# EAGLE board RobotArm (EAGLE 9.1.1)
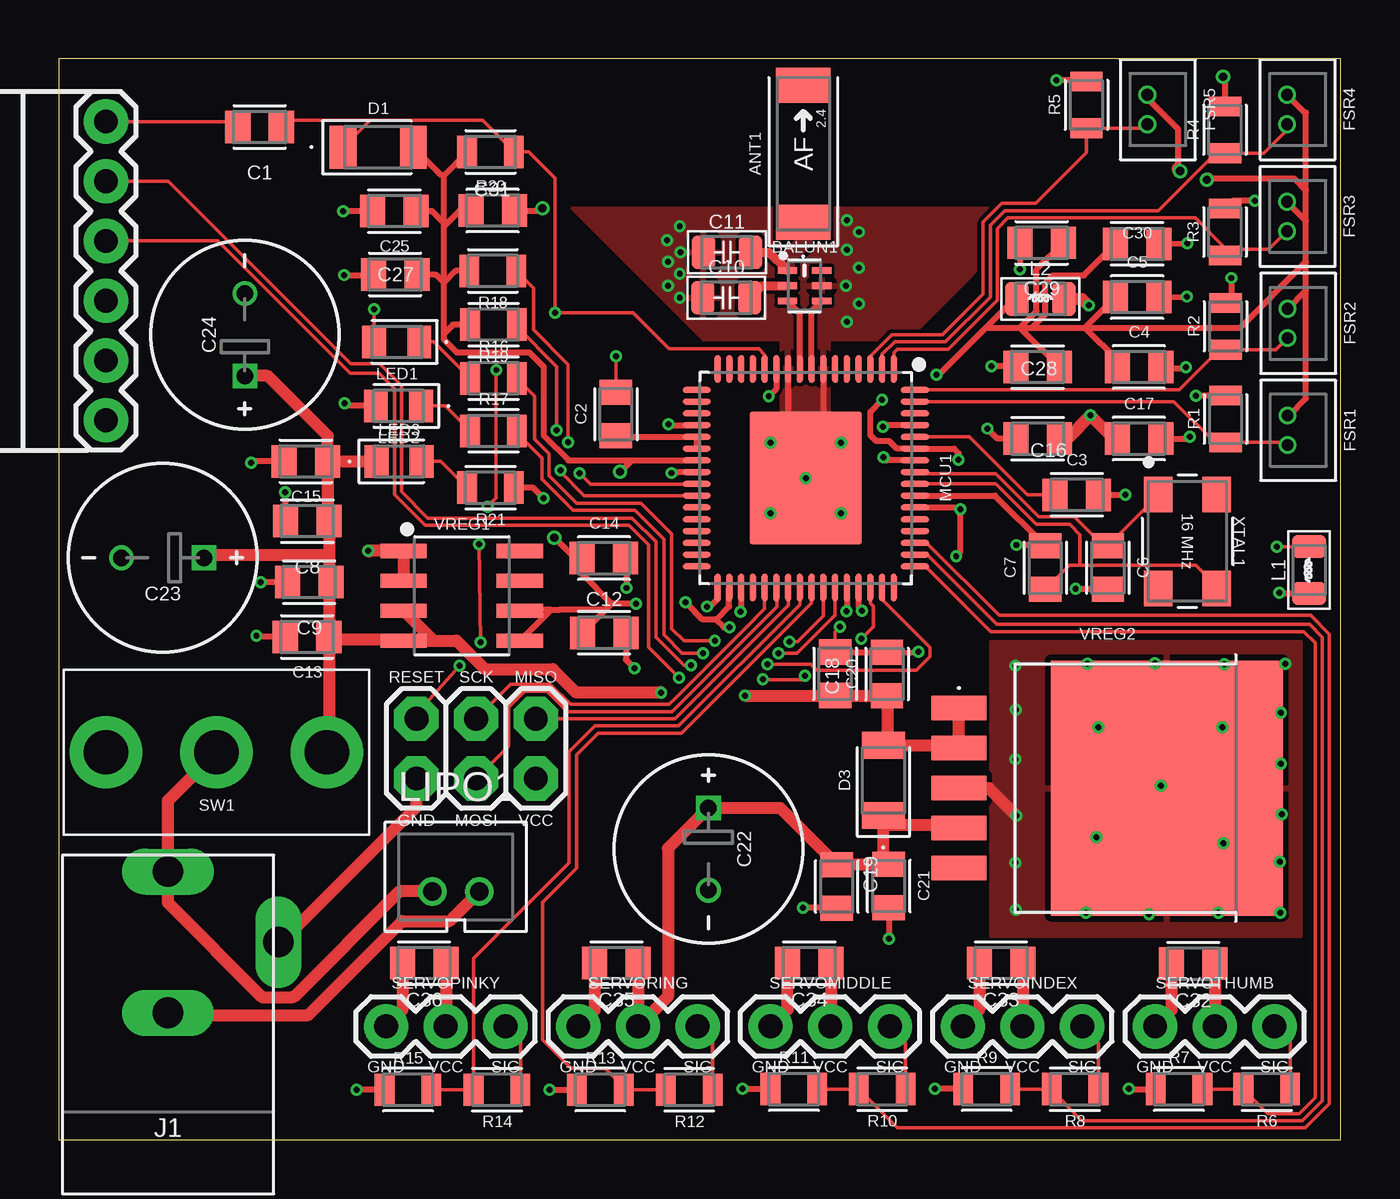
[diagram p0: board, top side]
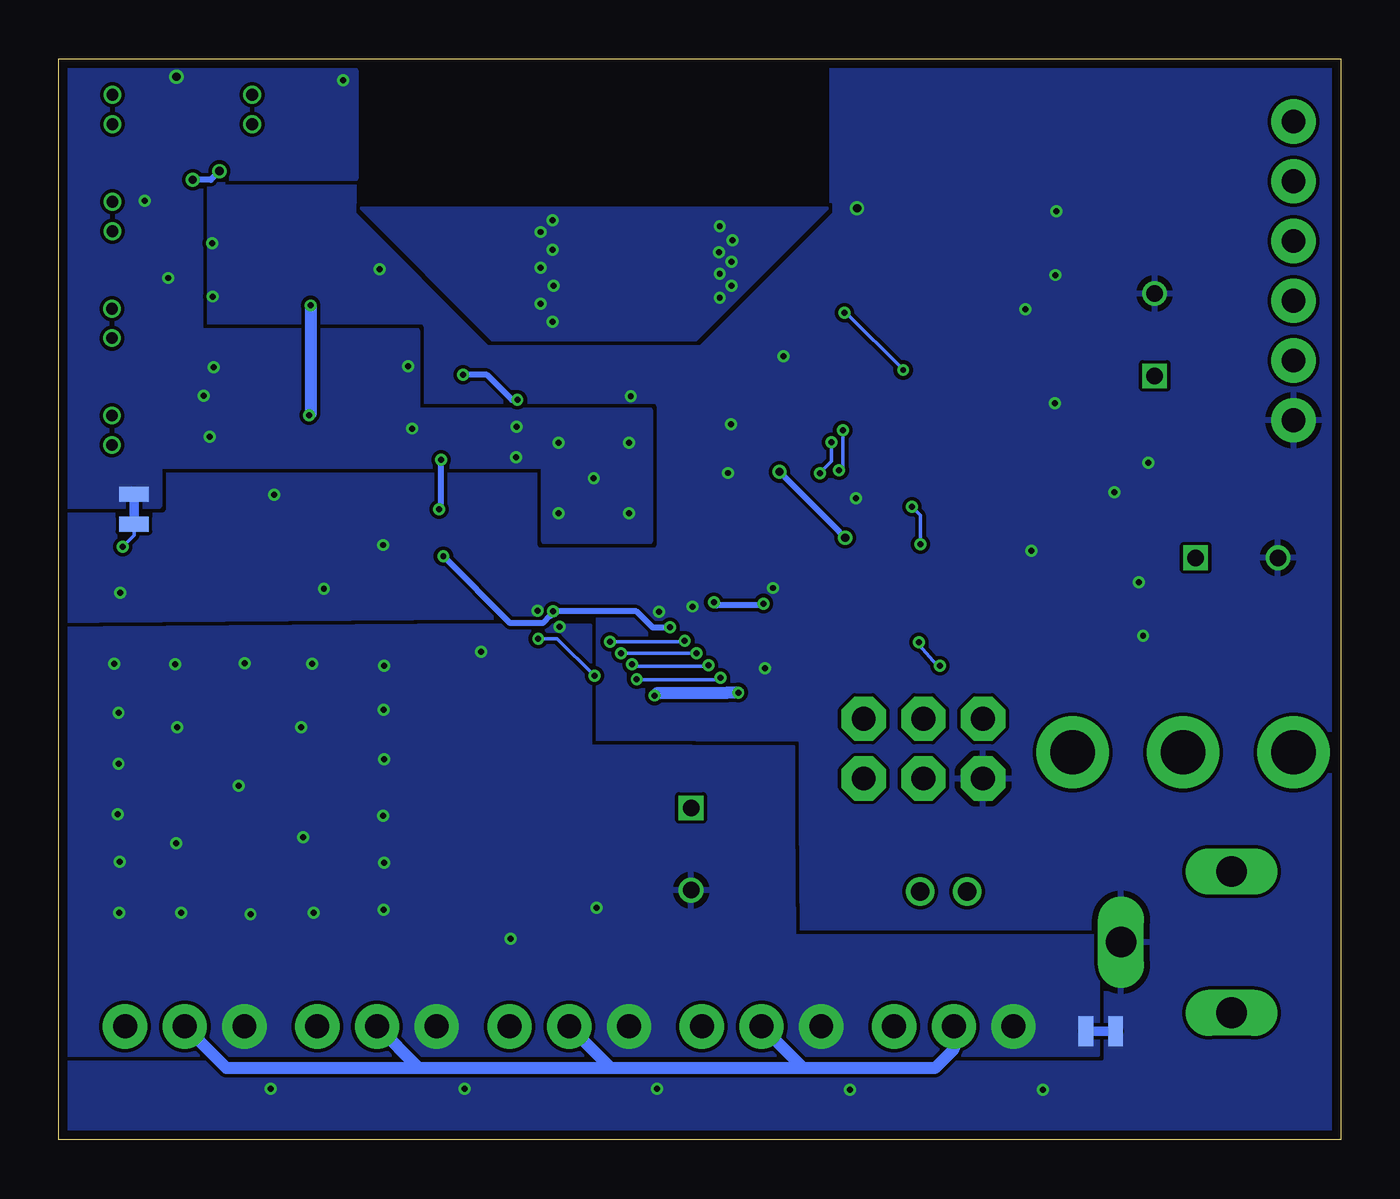
[diagram p1: board, bottom side, seen from below]

Size 54.53 x 45.97 mm. Coordinates in mm from the lower left corner, seen from the top.
Outline: 0,0 54.53,0 54.53,45.97 0,45.97 0,0
Copper layers (1*16): Top 0.035559375mm / dielectric 1.6mm / Bottom 0.035559375mm
Design rules "oshpark-2layer": minimum track width 6mil, minimum drill 10mil, track to track 6mil, track to pad 6mil, pad to pad 6mil, via to via 6mil, smd to smd 6mil, copper to edge 15mil, drill to drill 6mil, minimum pad ring 5mil, minimum via ring 5mil, stop-mask expansion 2.5mil, vias tented up to drill 0mil, thermal gap 10mil

## Footprints (pad centres in the part's own frame; a part is rotated, then mirrored left to right if it is on the bottom)
ANTC6522X100 = smd 1.478 x 2.312: 1 -2.917,0 | smd 1.482 x 2.312: 2 2.915,0
2X3-NS = drill 1.016 pad 1.88 octagon: GND 2.54,1.27; MISO -2.54,-1.27; MOSI 0,1.27; RESET 2.54,-1.27; SCK 0,-1.27; VCC -2.54,1.27
RESCAXE65P200X125X95-6 = smd 0.818 x 0.289: 1 -0.73,0.65; 2 -0.73,0; 3 -0.73,-0.65; 4 0.73,-0.65; 5 0.73,0; 6 0.73,0.65
CAPC2012X95_SMD-0805 = smd 1.065 x 1.379: 1 -0.925,0; 2 0.925,0
_CER_SMD-805 = smd 1 x 1.45: 1 -1,0; 2 1,0
_AE_PTH_DIA8-LS3.5-H21.50 = drill 0.7 square: + -1.75,0 | drill 0.7: - 1.75,0
SODFL3516X170 = smd 1.136 x 1.815: A -1.489,0; K 1.489,0
_MOLEX-0530470210_VERT_PITCH-1.25MM = drill 0.5: 1 -0.625,0; 2 0.625,0
FTDI_BASIC-6PIN-MALE-RA = drill 1.016 pad 1.88: CTS 0,3.76; DTR 0,-6.4; GND 0,6.3; RXI 0,-3.86; TXO 0,-1.32; VCC 0,1.22
POWER_JACK_PTH_ID2.1MM-OD5.5MM = drill 1.3 long: GND@1 0,-3; GND@2 4.7,0; PWR 0,3
_SMD-805 = smd 1 x 1.45: 1 -1,0; 2 1,0
LEDC2012X120_LED-0805 = smd 1.01 x 1.379: A -0.96,0; K 0.96,0
_MOLEX-89400_VERT_PITCH-2MM = drill 0.8: 1 -1,0; 2 1,0
QFN50P900X900X90-64 = smd 1.2 x 0.264: 1 -4.645,3.75; 2 -4.645,3.25; 3 -4.645,2.75; 4 -4.645,2.25; 5 -4.645,1.75; 6 -4.645,1.25; 7 -4.645,0.75; 8 -4.645,0.25; 9 -4.645,-0.25; 10 -4.645,-0.75; 11 -4.645,-1.25; 12 -4.645,-1.75; 13 -4.645,-2.25; 14 -4.645,-2.75; 15 -4.645,-3.25; 16 -4.645,-3.75; 33 4.645,-3.75; 34 4.645,-3.25; 35 4.645,-2.75; 36 4.645,-2.25; 37 4.645,-1.75; 38 4.645,-1.25; 39 4.645,-0.75; 40 4.645,-0.25; 41 4.645,0.25; 42 4.645,0.75; 43 4.645,1.25; 44 4.645,1.75; 45 4.645,2.25; 46 4.645,2.75; 47 4.645,3.25; 48 4.645,3.75 | smd 0.264 x 1.2: 17 -3.75,-4.645; 18 -3.25,-4.645; 19 -2.75,-4.645; 20 -2.25,-4.645; 21 -1.75,-4.645; 22 -1.25,-4.645; 23 -0.75,-4.645; 24 -0.25,-4.645; 25 0.25,-4.645; 26 0.75,-4.645; 27 1.25,-4.645; 28 1.75,-4.645; 29 2.25,-4.645; 30 2.75,-4.645; 31 3.25,-4.645; 32 3.75,-4.645; 49 3.75,4.645; 50 3.25,4.645; 51 2.75,4.645; 52 2.25,4.645; 53 1.75,4.645; 54 1.25,4.645; 55 0.75,4.645; 56 0.25,4.645; 57 -0.25,4.645; 58 -0.75,4.645; 59 -1.25,4.645; 60 -1.75,4.645; 61 -2.25,4.645; 62 -2.75,4.645; 63 -3.25,4.645; 64 -3.75,4.645 | smd 5.65 x 4.75: EP 0,0 | drill 0.254: P$1 -1.5,1.5; P$2 1.5,1.5; P$3 1.5,-1.5; P$4 -1.5,-1.5; P$5 0,0
2PT_GND_TIE = smd 0.635 x 1.27: P$1 -0.635,0; P$2 0.635,0
RESC2012X60_SMD-0805 = smd 0.838 x 1.379: 1 -0.995,0; 2 0.995,0
1X03-VERT-MALE = drill 1.016 pad 1.88: GND 2.54,0; SIG -2.54,0; VCC 0,0
SW_TOGGLE_SPDT_5A-28V_13L-7W = drill 1.875 pad 3.075: P 0,0; S1 0,-4.7; S2 0,4.7
SOIC127P600X265-8 = smd 1.968 x 0.599: 1 -2.473,1.905; 2 -2.473,0.635; 3 -2.473,-0.635; 4 -2.473,-1.905; 5 2.473,-1.905; 6 2.473,-0.635; 7 2.473,0.635; 8 2.473,1.905
TO170P1363X457-6 = smd 2.333 x 1.048: 1 -6.311,3.404; 2 -6.311,1.702; 3 -6.311,0; 4 -6.311,-1.702; 5 -6.311,-3.404 | smd 9.885 x 10.84: 6 2.535,0
OSCCC500X320X110 = smd 1.512 x 1.212: 1 -2,-1.25; 2 2,-1.25; 3 2,1.25; 4 -2,1.25

## Placement (x,y rotation side)
ANT1  2.45GHz  [ANTC6522X100]  31.67,41.94 90 top
AVR_ISP1  AVRISP  [2X3-NS]  17.75,16.64 180 top
BALUN1  50/100  [RESCAXE65P200X125X95-6]  31.72,36.32 0 top
C1  0.1uF/35V  [CAPC2012X95_SMD-0805]  8.54,43.08 180 top
C2  1uF/25V  [CAPC2012X95_SMD-0805]  23.7,30.86 90 top
C3  1uF/25V  [CAPC2012X95_SMD-0805]  43.31,27.43 0 top
C4  1uF/25V  [CAPC2012X95_SMD-0805]  45.95,32.87 0 top
C5  1uF/25V  [CAPC2012X95_SMD-0805]  45.87,35.84 0 top
C6  12pF/250V  [CAPC2012X95_SMD-0805]  44.63,24.33 270 top
C7  12pF/250V  [CAPC2012X95_SMD-0805]  41.96,24.33 90 top
C8  0.1uF/35V  [CAPC2012X95_SMD-0805]  10.58,26.31 180 top
C9  0.1uF/35V  [CAPC2012X95_SMD-0805]  10.65,23.72 180 top
C10  22PF/250V  [_CER_SMD-805]  28.4,35.81 0 top
C11  0.75PF/100V  [_CER_SMD-805]  28.42,37.74 0 top
C12  0.1uF/35V  [CAPC2012X95_SMD-0805]  23.2,21.56 0 top
C13  10uF/25V  [CAPC2012X95_SMD-0805]  10.57,21.39 180 top
C14  10uF/25V  [CAPC2012X95_SMD-0805]  23.19,24.74 0 top
C15  10uF/25V  [CAPC2012X95_SMD-0805]  10.52,28.85 180 top
C16  0.1uF/35V  [CAPC2012X95_SMD-0805]  41.64,29.82 180 top
C17  1uF/25V  [CAPC2012X95_SMD-0805]  45.95,29.82 0 top
C18  0.1uF/35V  [CAPC2012X95_SMD-0805]  33.02,19.82 90 top
C19  0.1uF/35V  [CAPC2012X95_SMD-0805]  33.1,10.78 270 top
C20  10uF/25V  [CAPC2012X95_SMD-0805]  35.23,19.81 90 top
C21  10uF/25V  [CAPC2012X95_SMD-0805]  35.31,10.79 270 top
C22  1000uF/16V  [_AE_PTH_DIA8-LS3.5-H21.50]  27.64,12.37 270 top
C23  1000uF/16V  [_AE_PTH_DIA8-LS3.5-H21.50]  4.42,24.75 180 top
C24  1000uF/16V  [_AE_PTH_DIA8-LS3.5-H21.50]  7.91,34.24 90 top
C25  1uF/25V  [CAPC2012X95_SMD-0805]  14.27,39.5 180 top
C27  0.1uF/35V  [CAPC2012X95_SMD-0805]  14.31,36.8 180 top
C28  0.1uF/35V  [CAPC2012X95_SMD-0805]  41.64,32.87 180 top
C29  0.1uF/35V  [CAPC2012X95_SMD-0805]  41.81,38.15 180 top
C30  1uF/25V  [CAPC2012X95_SMD-0805]  45.87,38.1 0 top
C31  0.1uF/35V  [CAPC2012X95_SMD-0805]  18.46,39.52 0 top
C32  10uF/25V  [CAPC2012X95_SMD-0805]  48.26,7.49 180 top
C33  10uF/25V  [CAPC2012X95_SMD-0805]  40.08,7.52 180 top
C34  10uF/25V  [CAPC2012X95_SMD-0805]  31.93,7.52 180 top
C35  10uF/25V  [CAPC2012X95_SMD-0805]  23.72,7.52 180 top
C36  10uF/25V  [CAPC2012X95_SMD-0805]  15.54,7.52 180 top
D1  1A/50V  [SODFL3516X170]  13.59,42.21 0 top
D3  1A/50V  [SODFL3516X170]  35.08,15.29 90 top
FSR1  10K  [_MOLEX-0530470210_VERT_PITCH-1.25MM]  52.27,30.18 270 top
FSR2  10K  [_MOLEX-0530470210_VERT_PITCH-1.25MM]  52.27,34.72 270 top
FSR3  10K  [_MOLEX-0530470210_VERT_PITCH-1.25MM]  52.25,39.27 270 top
FSR4  10K  [_MOLEX-0530470210_VERT_PITCH-1.25MM]  52.25,43.81 270 top
FSR5  10K  [_MOLEX-0530470210_VERT_PITCH-1.25MM]  46.3,43.81 270 top
FTDI1  FTDI  [FTDI_BASIC-6PIN-MALE-RA]  2.01,36.91 180 top
J1  5A/28V  [POWER_JACK_PTH_ID2.1MM-OD5.5MM]  4.65,8.41 0 top
L1  10uH  [_SMD-805]  53.19,24.23 90 top
L2  10uH  [_SMD-805]  41.76,35.76 0 top
LED1  GREEN  [LEDC2012X120_LED-0805]  14.38,33.93 180 top
LED2  GREEN  [LEDC2012X120_LED-0805]  14.45,31.22 180 top
LED3  BLUE  [LEDC2012X120_LED-0805]  14.48,28.85 0 top
LIPO1  Molex VERT 2mm pitch  [_MOLEX-89400_VERT_PITCH-2MM]  16.89,10.57 0 top
MCU1  ATMEGA128RFA1  [QFN50P900X900X90-64]  31.78,28.14 270 top
NET_BRIDGE1  2PT_GND_TIE  [2PT_GND_TIE]  10.21,4.62 0 bottom
NET_BRIDGE2  2PT_GND_TIE  [2PT_GND_TIE]  51.33,26.82 90 bottom
R1  2.2K  [RESC2012X60_SMD-0805]  49.63,30.66 90 top
R2  2.2K  [RESC2012X60_SMD-0805]  49.63,34.59 90 top
R3  2.2K  [RESC2012X60_SMD-0805]  49.61,38.61 90 top
R4  2.2K  [RESC2012X60_SMD-0805]  49.61,42.95 90 top
R5  2.2K  [RESC2012X60_SMD-0805]  43.71,44.02 90 top
R6  100  [RESC2012X60_SMD-0805]  51.38,2.16 180 top
R7  10K  [RESC2012X60_SMD-0805]  47.65,2.16 0 top
R8  100  [RESC2012X60_SMD-0805]  43.23,2.16 180 top
R9  10K  [RESC2012X60_SMD-0805]  39.47,2.16 0 top
R10  100  [RESC2012X60_SMD-0805]  35.03,2.16 180 top
R11  10K  [RESC2012X60_SMD-0805]  31.27,2.16 0 top
R12  100  [RESC2012X60_SMD-0805]  26.82,2.13 180 top
R13  10K  [RESC2012X60_SMD-0805]  23.04,2.13 0 top
R14  100  [RESC2012X60_SMD-0805]  18.64,2.13 180 top
R15  10K  [RESC2012X60_SMD-0805]  14.86,2.13 0 top
R16  1K  [RESC2012X60_SMD-0805]  18.49,32.38 0 top
R17  1K  [RESC2012X60_SMD-0805]  18.49,30.15 0 top
R18  10K  [RESC2012X60_SMD-0805]  18.47,36.96 180 top
R19  10K  [RESC2012X60_SMD-0805]  18.49,34.67 180 top
R20  10K  [RESC2012X60_SMD-0805]  18.36,42.01 180 top
R21  10K  [RESC2012X60_SMD-0805]  18.36,27.74 180 top
SERVOINDEX  MG90S  [1X03-VERT-MALE]  41,4.83 180 top
SERVOMIDDLE  MG90S  [1X03-VERT-MALE]  32.82,4.83 180 top
SERVOPINKY  MG90S  [1X03-VERT-MALE]  16.46,4.83 180 top
SERVORING  MG90S  [1X03-VERT-MALE]  24.64,4.83 180 top
SERVOTHUMB  MG90S  [1X03-VERT-MALE]  49.17,4.83 180 top
SW1  5A/28V  [SW_TOGGLE_SPDT_5A-28V_13L-7W]  6.71,16.48 90 top
VREG1  1A/3.3V  [SOIC127P600X265-8]  17.14,23.14 0 top
VREG2  5A/5V  [TO170P1363X457-6]  44.6,14.96 0 top
XTAL1  16 MHz  [OSCCC500X320X110]  48.01,25.45 270 top

## Library data of the parts
ANT1 = PiB_radio_frequency; DATASHEET: https://linxtechnologies.com/wp/wp-content/uploads/ant-fff-chp-x.pdf; DIST: Digikey; DISTLINK: https://www.digikey.com/products/en?keywords=ANT-2.45-CHPCT-ND; DISTPN: ANT-2.45-CHPCT-ND; MFR: Linx Technologies Inc.; MPN: ANT-2.45-CHP-T
AVR_ISP1 = PiB_connectors; DATASHEET: https://cdn.amphenol-icc.com/media/wysiwyg/files/drawing/67996.pdf; DIST: Digikey; DISTLINK: https://www.digikey.com/products/en?keywords=609-3234-ND; DISTPN: 609-3234-ND; MFR: Amphenol FCI; MPN: 67997-206HLF
BALUN1 = PiB_radio_frequency; DATASHEET: http://katalog.we-online.de/pbs/datasheet/748421245.pdf; DIST: Digikey; DISTLINK: https://www.digikey.com/products/en?keywords=732-2230-6-ND; DISTPN: 732-2230-6-ND; MFR: Wurth Electronics Inc.; MPN: 748421245
C1 C8 C9 C12 C16 C18 C19 C27-C29 C31 = PiB_capacitors; DATASHEET: http://ds.yuden.co.jp/TYCOMPAS/ut/detail.do?productNo=GMK212BJ104KGHT&fileName=GMK212BJ104KGHT_SS&mode=specSheetDownload; DIST: Digikey; DISTLINK: https://www.digikey.com/products/en?keywords=587-3364-1-ND; DISTPN: 587-3364-1-ND; MFR: Taiyo Yuden; MPN: GMK212BJ104KGHT
C2-C5 C17 C25 C30 = PiB_capacitors; DATASHEET: https://search.murata.co.jp/Ceramy/image/img/A01X/G101/ENG/GRM216R61E105KA12-01.pdf; DIST: Digikey; DISTLINK: https://www.digikey.com/products/en?keywords=490-1700-1-ND; DISTPN: 490-1700-1-ND; MFR: Murata Electronics North America; MPN: GRM216R61E105KA12D
C6 C7 = PiB_capacitors; DATASHEET: http://search.murata.co.jp/Ceramy/image/img/A01X/G101/ENG/GRM21A5C2E120JW01-01.pdf; DIST: Digikey; DISTLINK: https://www.digikey.com/products/en?keywords=490-5531-1-ND; DISTPN: 490-5531-1-ND; MFR: Murata Electronics North America; MPN: GRM21A5C2E120JW01D
C10 = PiB_capacitors; CREATOR: Kenmei; DATASHEET: http://search.murata.co.jp/Ceramy/image/img/A01X/G101/ENG/GRM21A5C2E220JW01-01.pdf; DIST: Digikey; DISTLINK: https://www.digikey.com/product-detail/en/murata-electronics-north-america/GRM21A5C2E220JW01D/490-5534-1-ND/2334930; DISTPN: 490-5534-1-ND; MFR: Murata Electronics North America; MPN: GRM21A5C2E220JW01D; TESTED: NO
C11 = PiB_capacitors; CREATOR: Kenmei; DATASHEET: http://search.murata.co.jp/Ceramy/image/img/A01X/G101/ENG/GQM2195C2AR75CB01-01.pdf; DIST: Digikey; DISTLINK: https://www.digikey.com/product-detail/en/murata-electronics-north-america/GQM2195C2AR75CB01D/490-3585-1-ND/789585; DISTPN: 490-3585-1-ND; MFR: Murata Electronics North America; MPN: GQM2195C2AR75CB01D; TESTED: NO
C13-C15 C20 C21 C32-C36 = PiB_capacitors; DATASHEET: https://www.yuden.co.jp/productdata/catalog/mlcc_all_e.pdf; DIST: Digikey; DISTLINK: https://www.digikey.com/products/en?keywords=587-2985-1-ND; DISTPN: 587-2985-1-ND; MFR: Taiyo Yuden; MPN: TMK212BBJ106KG-T
C22-C24 = PiB_capacitors; DATASHEET: http://www.chemi-con.co.jp/cgi-bin/CAT_DB/SEARCH/cat_db_al.cgi?e=e&j=p&pdfname=kzm; DIST: Digikey; DISTLINK: https://www.digikey.com/products/en?keywords=565-3567-ND; DISTPN: 565-3567-ND; MFR: United Chemi-Con; MPN: EKZM160ELL102MH20D
D1 D3 = PiB_discrete_semiconductors; DATASHEET: http://www.comchiptech.com/cms/UserFiles/CGRKM4001-HF%20Thru.%20CGRKM4007-HF%20RevG.pdf; DIST: Digikey; DISTLINK: https://www.digikey.com/products/en?keywords=641-1511-1-ND; DISTPN: 641-1511-1-ND; MFR: Comchip Technology; MPN: CGRKM4001-HF
FSR1-FSR5 = PiB_sensors; DATASHEET: https://cdn2.hubspot.net/hubfs/3899023/Interlinkelectronics%20November2017/Docs/Datasheet_FSR.pdf; DATASHEET_CONNECTOR1: https://www.molex.com/pdm_docs/sd/530470210_sd.pdf; DATASHEET_CONNECTOR2: https://www.molex.com/pdm_docs/sd/510210700_sd.pdf; DATASHEET_CRIMP: https://www.molex.com/pdm_docs/sd/500798000_sd.pdf; DIST: Digikey; DISTLINK: https://www.digikey.com/products/en?keywords=1027-1014-ND; DISTLINK_CONNECTOR1: https://www.digikey.com/products/en?keywords=WM1731-ND; DISTLINK_CONNECTOR2: https://www.digikey.com/products/en?keywords=WM1720-ND; DISTLINK_CRIMP: https://www.digikey.com/products/en?keywords=WM1142CT-ND; DISTPN: 1027-1014-ND; DISTPN_CONNECTOR1: WM1731-ND; DISTPN_CONNECTOR2: WM1720-ND; DISTPN_CRIMP: WM1142CT-ND; DIST_CONNECTOR1: Digikey; DIST_CONNECTOR2: Digikey; DIST_CRIMP: Digikey; MFR: Spectra Symbol; MFR_CONNECTOR1: Molex, LLC; MFR_CONNECTOR2: Molex, LLC; MFR_CRIMP: Molex, LLC; MPN: FS-L-0095-103-ST; MPN_CONNECTOR1: 0530470210; MPN_CONNECTOR2: 51021-0200; MPN_CRIMP: 0500798000
FTDI1 = PiB_connectors; DATASHEET: https://media.digikey.com/pdf/Data%20Sheets/Sparkfun%20PDFs/DEV-09873_Web.pdf; DATASHEET_CONNECTOR: https://cdn.amphenol-icc.com/media/wysiwyg/files/drawing/68015.pdf; DIST: Digikey; DISTLINK: https://www.digikey.com/products/en?keywords=1568-1104-ND; DISTLINK_CONNECTOR: https://www.digikey.com/products/en?keywords=609-3327-ND; DISTPN: 1568-1104-ND; DISTPN_CONNECTOR: 609-3327-ND; DIST_CONNECTOR: Digikey; MFR: SparkFun Electronics; MFR_CONNECTOR: Amphenol FCI; MPN: DEV-09873; MPN_CONNECTOR: 68016-406HLF
J1 = PiB_connectors; DATASHEET: https://www.cui.com/product/resource/pj-102a.pdf; DIST: Digikey; DISTLINK: https://www.digikey.com/products/en?keywords=CP-102A-ND; DISTPN: CP-102A-ND; MFR: CUI Inc.; MPN: PJ-102A
L1 L2 = PiB_inductors; CREATOR: MrSwirlyEyes; DATASHEET: http://ds.yuden.co.jp/TYCOMPAS/ut/detail.do?productNo=CB2012T100KR&fileName=CB2012T100KR_SS&mode=specSheetDownload; DIST: Digikey; DISTLINK: https://www.digikey.com/products/en?keywords=587-2452-1-ND; DISTPN: 587-2452-1-ND; MFR: Taiyo Yuden; MPN: CB2012T100KR
LED1 LED2 = PiB_leds; DATASHEET: http://optoelectronics.liteon.com/upload/download/DS22-2000-073/LTST-C170KGKT.pdf; DIST: Digikey; DISTLINK: https://www.digikey.com/products/en?keywords=160-1414-1-ND; DISTPN: 160-1414-1-ND; MFR: Lite-On Inc.; MPN: LTST-C170KGKT
LED3 = PiB_leds; DATASHEET: http://optoelectronics.liteon.com/upload/download/DS-22-99-0226/LTST-C170TBKT.pdf; DIST: Digikey; DISTLINK: https://www.digikey.com/products/en?keywords=160-1579-1-ND; DISTPN: 160-1579-1-ND; MFR: Lite-On Inc.; MPN: LTST-C170TBKT
LIPO1 = PiB_connectors; DATASHEET_CONNECTOR1: https://www.molex.com/pdm_docs/sd/894000220_sd.pdf; DATASHEET_CONNECTOR2: https://www.molex.com/pdm_docs/sd/873690200_sd.pdf; DATASHEET_CRIMP: https://www.molex.com/pdm_docs/sd/502128000_sd.pdf; DISTLINK_CONNECTOR1: https://www.digikey.com/products/en?keywords=WM4340-ND; DISTLINK_CONNECTOR2: https://www.digikey.com/products/en?keywords=WM10118-ND; DISTLINK_CRIMP: https://www.digikey.com/products/en?keywords=WM4561CT-ND; DISTPN_CONNECTOR1: WM4340-ND; DISTPN_CONNECTOR2: WM10118-ND; DISTPN_CRIMP: WM4561CT-ND; DIST_CONNECTOR1: Digikey; DIST_CONNECTOR2: Digikey; DIST_CRIMP: Digikey; MFR_CONNECTOR1: Molex, LLC; MFR_CONNECTOR2: Molex, LLC; MFR_CRIMP: Molex, LLC; MPN_CONNECTOR1: 0894000220; MPN_CONNECTOR2: 0873690200; MPN_CRIMP: 50212-8000
MCU1 = PiB_ic_microcontrollers; DATASHEET: http://www.microchip.com/mymicrochip/filehandler.aspx?ddocname=en590262; DIST: Digikey; DISTLINK: https://www.digikey.com/products/en?keywords=ATMEGA128RFA1-ZU-ND; DISTPN: ATMEGA128RFA1-ZU-ND; MFR: Microchip Technology; MPN: ATMEGA128RFA1-ZU
NET_BRIDGE1 NET_BRIDGE2 = PiB_power_symbols
R1-R5 = PiB_resistors; DATASHEET: http://www.yageo.com/NewPortal/yageodocoutput?fileName=/pdf/R-Chip/PYu-RC_51_RoHS_P_0.pdf; DIST: Digikey; DISTLINK: https://www.digikey.com/products/en?keywords=YAG1332CT-ND; DISTPN: YAG1332CT-ND; MFR: Yageo; MPN: RC0805JR-072K2P
R6 R8 R10 R12 R14 = PiB_resistors; DATASHEET: http://www.yageo.com/NewPortal/yageodocoutput?fileName=/pdf/R-Chip/PYu-AC_51_RoHS_L_6.pdf; DIST: Digikey; DISTLINK: https://www.digikey.com/products/en?keywords=YAG3757CT-ND; DISTPN: YAG3757CT-ND; MFR: Yageo; MPN: AC0805JR-07100RL
R7 R9 R11 R13 R15 R18-R21 = PiB_resistors; DATASHEET: http://www.yageo.com/documents/recent/PYu-RC_Group_51_RoHS_L_9.pdf; DIST: Digikey; DISTLINK: https://www.digikey.com/products/en?keywords=311-10KARCT-ND; DISTPN: 311-10KARCT-ND; MFR: Yageo; MPN: RC0805JR-0710KL
R16 R17 = PiB_resistors; DATASHEET: http://www.yageo.com/documents/recent/PYu-RC_Group_51_RoHS_L_9.pdf; DIST: Digikey; DISTLINK: https://www.digikey.com/products/en?keywords=311-1.0KARCT-ND; DISTPN: 311-1.0KARCT-ND; MFR: Yageo; MPN: RC0805JR-071KL
SERVOINDEX SERVOMIDDLE SERVOPINKY SERVORING SERVOTHUMB = PiB
SW1 = PiB_switches; DATASHEET: http://spec_sheets.e-switch.com/specs/T111597.pdf; DIST: Digikey; DISTLINK: https://www.digikey.com/products/en?keywords=EG2355-ND; DISTPN: EG2355-ND; MFR: E-Switch; MPN: 100SP1T1B4M2QE
VREG1 = PiB_ic_power; DATASHEET: http://www.ti.com/lit/ds/symlink/tps768.pdf; DIST: Digikey; DISTLINK: https://www.digikey.com/products/en?keywords=296-46395-1-ND; DISTPN: 296-46395-1-ND; MFR: Texas Instruments; MPN: TPS76833QDR
VREG2 = PiB_ic_power; DATASHEET: http://ww1.microchip.com/downloads/en/DeviceDoc/20005685A.pdf; DIST: Digikey; DISTLINK: https://www.digikey.com/products/en?keywords=576-2240-ND; DISTPN: 576-2240-ND; MFR: Microchip Technology; MPN: MIC29501-5.0WU
XTAL1 = PiB; DATASHEET: https://abracon.com/Resonators/abm3b.pdf; DIST: Digikey; DISTLINK: https://www.digikey.com/products/en?keywords=535-9122-1-ND; DISTPN: 535-9122-1-ND; MFR: Abracon LLC; MPN: ABM3B-16.000MHZ-B2-T

## Nets
5V: C19.1 C21.1 C22.+ C32.1 C33.1 C34.1 C35.1 C36.1 D3.A SERVOINDEX.VCC SERVOMIDDLE.VCC SERVOPINKY.VCC SERVORING.VCC SERVOTHUMB.VCC VREG2.4
+: J1.PWR LIPO1.1 SW1.P
-: J1.GND@1 LIPO1.2
A5: MCU1.4
A6: MCU1.5
A7: MCU1.6
AGND: BALUN1.5 C4.2 C10.1 C11.1 C16.2 C17.2 C28.2 MCU1.7 MCU1.10 MCU1.58 MCU1.61 MCU1.EP MCU1.P$1 MCU1.P$2 MCU1.P$3 MCU1.P$4 MCU1.P$5 NET_BRIDGE2.P$2 R1.2 R2.2 R3.2 R4.2 R5.2
AVCC: C16.1 C17.1 L2.2
GND: AVR_ISP1.GND C2.2 C3.2 C5.2 C6.2 C7.2 C8.2 C9.2 C12.2 C13.2 C14.2 C15.2 C23.- C24.- C25.2 C27.2 C29.2 C30.2 C31.2 FTDI1.GND J1.GND@2 L1.1 LED1.K LED2.K MCU1.11 MCU1.20 MCU1.24 MCU1.33 MCU1.35 MCU1.45 MCU1.55 NET_BRIDGE1.P$2 R7.1 R9.1 R11.1 R13.1 R15.1 R21.1 VREG1.1 VREG1.2
MISO: AVR_ISP1.MISO MCU1.39
MOSI: AVR_ISP1.MOSI MCU1.38
N$1: R6.1 SERVOTHUMB.SIG
N$2: LED1.A R16.1
N$3: R8.1 SERVOINDEX.SIG
N$4: R10.1 SERVOMIDDLE.SIG
N$5: R12.1 SERVORING.SIG
N$6: R14.1 SERVOPINKY.SIG
N$7: LED2.A R17.1
N$8: C6.1 MCU1.57 XTAL1.1
N$9: C7.1 MCU1.56 XTAL1.3
N$10: C1.2 FTDI1.DTR
N$11: BALUN1.4 MCU1.8
N$12: BALUN1.3 MCU1.9
N$13: MCU1.62
N$14: C3.1 MCU1.60
N$15: C2.1 MCU1.21 MCU1.22
N$16: BALUN1.2 C10.2
N$17: ANT1.1 BALUN1.1 C11.2
N$19: L1.2 NET_BRIDGE2.P$1
N$20: LED3.K R21.2
N$23: MCU1.48
N$24: MCU1.52
N$25: MCU1.53
NGND: C18.2 C19.2 C20.2 C21.2 C22.- C32.2 C33.2 C34.2 C35.2 C36.2 NET_BRIDGE1.P$1 SERVOINDEX.GND SERVOMIDDLE.GND SERVOPINKY.GND SERVORING.GND SERVOTHUMB.GND VREG2.3 VREG2.6
PB6: MCU1.42 R16.2
PB7: MCU1.43 R17.2
PD4: MCU1.29
PD5: MCU1.30
PD6: MCU1.31
PD7: MCU1.32
PG0: MCU1.14
PG1: MCU1.15
PG2: MCU1.16
PG3: MCU1.17
PG4: MCU1.18
PG5: MCU1.19
PRESS-INDEX: FSR2.2 MCU1.64 R2.1
PRESS-MIDDLE: FSR3.2 MCU1.1 R3.1
PRESS-PINKY: FSR5.2 MCU1.3 R5.1
PRESS-RING: FSR4.2 MCU1.2 R4.1
PRESS-THUMB: FSR1.2 MCU1.63 R1.1
RESET: AVR_ISP1.RESET C1.1 D1.A MCU1.12 R20.1
RX0: FTDI1.TXO MCU1.46
RX1: MCU1.27
SCK: AVR_ISP1.SCK MCU1.37
SCL: MCU1.25 R18.1
SDA: MCU1.26 R19.1
SERVO-INDEX: MCU1.50 R8.2 R9.2
SERVO-MIDDLE: MCU1.51 R10.2 R11.2
SERVO-PINKY: MCU1.40 R14.2 R15.2
SERVO-RING: MCU1.41 R12.2 R13.2
SERVO-THUMB: MCU1.49 R6.2 R7.2
SSN: MCU1.36
TX0: FTDI1.RXI MCU1.47
TX1: MCU1.28
VBAT: C8.1 C9.1 C13.1 C15.1 C18.1 C20.1 C23.+ C24.+ D3.K LED3.A SW1.S1 VREG1.3 VREG1.4 VREG2.1 VREG2.2
VCC: C4.1 C5.1 C12.1 C14.1 C25.1 C27.1 C28.1 C29.1 C30.1 C31.1 D1.K FSR1.1 FSR2.1 FSR3.1 FSR4.1 FSR5.1 L2.1 MCU1.23 MCU1.34 MCU1.44 MCU1.54 MCU1.59 R18.2 R19.2 R20.2 VREG1.5 VREG1.6

## Tracks (layer width: path | path; a pad name or v marks a point on that pad's centre or on a via)
5V
  Top 0.508: C32.1 49.19,4.84 SERVOTHUMB.VCC | C33.1 SERVOINDEX.VCC | C35.1 SERVORING.VCC | SERVORING.VCC | C36.1 SERVOPINKY.VCC | C34.1 32.85,4.86 SERVOMIDDLE.VCC | 35.08,13.39 35.08,11.95 arc90 C21.1 C19.1 arc90 C19.1 30.68,14.12 C22.+ 25.91,12.39 25.91,6.1 SERVORING.VCC | D3.A 35.08,13.39 | VREG2.4 arc90 38.16,13.39 35.08,13.39
  Bottom 0.508: SERVOPINKY.VCC 16.46,3.86 17.27,3.05 22.86,3.05 | 22.86,3.05 31.04,3.05 | 31.04,3.05 39.22,3.05 | 39.22,3.05 47.4,3.05 SERVOTHUMB.VCC | SERVOINDEX.VCC 39.22,3.05 | SERVOMIDDLE.VCC 31.04,3.05 | SERVORING.VCC 22.86,3.05
+
  Top 0.508: LIPO1.1 14.48,10.57 9.98,6.07 9.94,6.07 9.92,6.05 8.68,6.05 4.65,10.09 J1.PWR 4.65,14.43 SW1.P
-
  Top 0.508: LIPO1.2 16.62,9.3 14.61,9.3 10.61,5.31 4.75,5.31 J1.GND@1
AGND  (via drill 0.25, 0.35)
  Top 0.152: C4.2 46.92,32.82 | 47.98,32.82 v47.95,32.85 | C28.2 40.69,32.89
  Top 0.254: v49.89,36.65 49.89,35.84 R2.2 | 46.92,32.82 47.98,32.82 | v48.36,31.65 R1.2 | C17.2 48.03,29.82 v48.11,29.9 | C16.2 39.93,29.82 v39.5,30.25 | 40.69,32.89 v39.67,32.89 | v50.88,39.93 49.93,39.93 R3.2 | v42.44,45.06 43.67,45.06 R5.2 | MCU1.61 35.12,30.39 v35.05,30.33 | MCU1.58 35.22,28.89 v35.08,29.03 | MCU1.7 32.52,30.39 MCU1.P$1 | MCU1.10 31.02,30.39 MCU1.P$4 | v49.53,45.21 49.61,45.14 R4.2
  other vias: 33.48,36.32 26.42,35.81 26.44,37.74 26.42,36.83 25.88,38.25 34.04,35.56 33.53,34.8 34.04,37.08 33.53,37.85 34.04,38.61 33.53,39.12 25.91,36.32 25.91,37.34 26.42,38.86
  pour Bottom (rank 2): 55.58,45.49 48.26,45.49 41.91,45.47 41.91,40.89 48.51,40.89 48.51,34.42 39.29,34.42 39.29,31.04 29.39,31.04 29.39,28.3 29.39,25.45 33.88,25.45 33.88,28.65 34.06,28.65 50.27,28.65 50.27,26.95 55.09,26.95 55.52,26.95
  pour Top (rank 2): 30.73,30.73 30.73,34.04 27.43,34.04 21.84,39.62 41.67,39.62 36.09,34.04 32.77,34.04 32.77,30.73
  pour Bottom: 21.84,39.62 27.43,34.04 35.56,34.04 36.09,34.04 41.68,39.62
AVCC  (via drill 0.25)
  Top 0.508: v43.81,35.48 43.8,35.48 43.52,35.76 L2.2 | C16.1 42.9,29.82 v43.89,30.81 44.88,29.82 C17.1
  Bottom 0.508: v43.81,35.48 43.81,30.89 v43.89,30.81
GND  (via drill 0.25, 0.35)
  Top 0.152: 45.54,2.16 v45.52,2.18 | R9.1 38.45,2.18 | 30.25,2.18 R11.1 | 51.95,23.23 v51.92,23.27 | LED1.K v13.41,35.33 | v23.7,33.33 C2.2
  Top 0.254: v20.88,2.13 R13.1 | v29.08,2.18 30.25,2.18 | 45.54,2.16 R7.1 | 38.45,2.18 v37.26,2.18 | R15.1 v12.68,2.13 | C9.2 v8.59,23.72 | C15.2 8.23,28.85 v8.18,28.8 | MCU1.24 26.31,28.39 26.28,28.36 v26.06,28.36 | v43.26,23.44 44.63,23.44 C6.2 | L1.1 51.95,23.23 | v20.62,27.28 20.17,27.74 R21.1 | C5.2 v47.98,35.87 | C30.2 v48.01,38.12 | v40.89,37.03 40.89,38.14 C29.2 | v12.14,36.78 13.36,36.78 C27.2 | C25.2 v12.09,39.5 | v40.74,25.3 41.96,25.3 C7.2 39.83,27.39 MCU1.55 | C3.2 v45.36,27.43 | MCU1.45 34.02,22.71 34.16,22.57 v34.16,22.5 | LED2.K 12.27,31.22 v12.17,31.32 | v9.63,27.53 9.63,26.34 C8.2 | C13.2 8.46,21.39 v8.41,21.44 | C14.2 24.16,24.7 v24.16,23.47 | C12.2 24.13,20.43 v24.49,20.07 | MCU1.35 29.02,22.48 v29,22.45 | MCU1.33 28.02,23 27.71,22.68 v27.58,22.68 | v25.93,30.43 26.05,30.43 26.09,30.39 MCU1.20 | MCU1.11 30.52,31.95 v30.2,31.62 | C31.2 20.47,39.52 v20.57,39.62
  Top 0.508: VREG1.2 VREG1.1 13.21,25.04 13.18,25.02 v13.16,25.04 | AVR_ISP1.GND 15.21,14.17 9.45,8.41 J1.GND@2
  pour Bottom (rank 3): 49.63,45.34 42.04,45.34 41.99,45.39 41.99,39.57 21.62,39.57 21.62,45.85 -8.64,45.85 -8.64,-7.95 57.51,-7.95 57.51,45.34
MISO
  Top 0.152: 31.05,22.75 31.05,23.11 | 31.05,23.11 31.05,23.22 | 31.05,23.22 31.05,23.47 | AVR_ISP1.MISO 26.21,17.91 31.05,22.75 | MCU1.39 31.05,23.47 | 31.05,23.47 31.05,23.22 | 31.05,22.75 31.05,23.11
MOSI
  Top 0.152: AVR_ISP1.MOSI 19.13,16.74 19.13,18.39 19.81,19.07 20.78,19.07 21.64,18.21 26.09,18.21 30.55,22.68 | MCU1.38 30.55,23.47 30.55,22.96 | 30.55,22.96 30.55,22.68 | 30.55,22.68 30.55,22.96
N$1
  Top 0.152: SERVOTHUMB.SIG 52.38,4.16 R6.1
N$2
  Top 0.152: LED1.A 15.95,33.93 R16.1
N$3
  Top 0.152: SERVOINDEX.SIG 44.23,4.14 R8.1
N$4
  Top 0.152: SERVOMIDDLE.SIG 35.48,4.7 35.48,4.68 36.02,4.14 R10.1
N$5
  Top 0.152: SERVORING.SIG 27.82,4.19 R12.1
N$6
  Top 0.152: SERVOPINKY.SIG 19.64,4.19 R14.1
N$7
  Top 0.152: LED2.A 16.43,31.22 R17.1
N$8
  Top 0.152: MCU1.57 36.48,28.33 39.87,28.33 41.7,26.5 43.19,26.5 44.44,25.26 C6.1 46.76,27.39 XTAL1.1
N$9
  Top 0.152: 43.45,24.43 48.37,24.43 49,23.81 49,23.71 XTAL1.3 | C7.1 42.99,24.43 43.45,24.43 | MCU1.56 39.87,27.89 41.59,26.17 43.02,26.17 43.45,25.74 43.45,24.43
N$10
  Top 0.152: FTDI1.DTR 7.38,43.31 C1.2
N$11
  Top 0.254: MCU1.8 32.02,35.24 BALUN1.4
N$12
  Top 0.254: MCU1.9 31.52,35.14 BALUN1.3
N$14
  Top 0.152: MCU1.60 38.74,29.89 41.2,27.43 C3.1
N$15
  Top 0.254: C2.1 23.74,29.89 MCU1.21 MCU1.22
N$16
  Top 0.381: C10.2 29.91,36.32 BALUN1.2
N$17
  Top 0.381: C11.2 30.22,37.74 BALUN1.1
  pour Top (no thermals): 31.5,39.12 31.5,38.35 30.73,37.59 30.73,36.91 31.24,36.91 31.24,37.34 32,38.1 32,39.12
N$19  (via drill 0.25)
  Top 0.152: v51.82,25.22 53.18,25.22 L1.2
  Bottom 0.152: NET_BRIDGE2.P$1 51.33,25.7 v51.82,25.22
N$20
  Top 0.152: LED3.K 16.25,28.85 R21.2
NGND  (via drill 0.25)
  Top 0.152: 36.6,20.73 v36.58,20.75 | v33.22,21.82 33.02,21.61 C18.2 | C19.2 33.07,9.88 arc-90 C19.2 | 35.29,9.86 arc-90 35.31,9.84 arc90 35.29,9.86
  Top 0.254: 33.07,9.88 v31.65,9.88 | 35.31,9.84 v35.31,8.56 | 36.6,20.73 C20.2 C18.2
  Top 0.508: C36.2 14.62,5.53 SERVOPINKY.GND | C35.2 22.8,5.53 SERVORING.GND | C33.2 39.16,5.53 SERVOINDEX.GND | SERVOTHUMB.GND 47.34,5.53 C32.2 | C34.2 31,5.55 SERVOMIDDLE.GND | 35.29,9.86 C21.2 | VREG2.3 39.57,14.96 v40.74,13.79
  other vias: 40.72,9.78 40.69,11.79 40.72,18.29 40.69,20.17 46.89,15.06 44.15,12.88 44.22,17.55 51.99,18.16 49.53,12.62 40.69,16.18 43.69,9.65 46.38,9.6 49.33,9.65 51.97,9.65 51.94,11.84 52.02,13.84 49.5,17.55 51.99,16 52.17,20.24 43.76,20.24 46.63,20.27 49.58,20.22
  pour Bottom (rank 2): 23.25,8.69 10.31,8.69 10.31,3.61 55.32,3.61 55.32,21.75 39.24,21.89 31.9,21.89 31.9,16.76 23.27,16.71 23.29,16.69 23.29,13.62
  pour Top: 52.83,21.18 52.83,8.66 39.65,8.66 39.65,21.18
PB6  (via drill 0.25)
  Top 0.152: MCU1.42 32.52,22.29 31.42,21.18 v31.09,21.18 | R16.2 20.24,31.62 20.24,29.8 20.85,29.19 20.85,28.25 22.02,27.08 24.76,27.08 26.07,25.77 26.07,21.74 26.59,21.22 v27.91,21.22
  Bottom 0.152: v31.09,21.18 27.94,21.18 v27.91,21.22
PB7  (via drill 0.25)
  Top 0.152: MCU1.43 33.01,23.49 33.01,22.32 31.4,20.7 v30.61,20.7 | R17.2 19.49,30.05 20.55,28.99 20.55,28.09 21.87,26.77 24.51,26.77 25.74,25.54 25.74,21.48 26.52,20.7 v27.41,20.7
  Bottom 0.152: v30.61,20.7 v27.41,20.7
PRESS-INDEX
  Top 0.152: FSR2.2 51.78,33.6 R2.1 49.38,33.6 47.68,31.9 40.09,31.9 40.09,31.89 MCU1.64
PRESS-MIDDLE
  Top 0.152: FSR3.2 51.47,37.87 50.04,37.87 49.78,37.61 R3.1 49.61,37.94 48.34,39.21 40.38,39.21 39.93,38.75 39.93,35.71 37.85,33.63 35.69,33.63 35.52,33.47 MCU1.1
PRESS-PINKY
  Top 0.152: FSR5.2 46.14,43.02 R5.1 43.71,41.97 43.54,41.8 41.57,39.83 40.13,39.83 39.32,39.02 39.32,35.97 37.59,34.24 35.43,34.24 34.52,33.33 MCU1.3
PRESS-RING
  Top 0.152: MCU1.2 35.02,33.4 35.56,33.93 37.72,33.93 39.62,35.84 39.62,38.9 40.25,39.52 46.77,39.52 49.21,41.96 R4.1 51.27,41.96 52.25,42.94 FSR4.2
PRESS-THUMB
  Top 0.152: FSR1.2 52.16,29.66 R1.1 49.17,29.66 47.44,31.39 MCU1.63
RESET  (via drill 0.25)
  Top 0.152: MCU1.12 30.02,33.4 29.79,33.64 25.96,33.64 24.42,35.18 v21.11,35.18 21.11,40.89 19.99,42.01 R20.1 18.02,43.35 13.72,43.35 13.24,43.35 | v17.88,25.32 v17.94,21.17 | v17.04,20.17 15.21,18.13 AVR_ISP1.RESET | v18.24,26.92 18.61,27.3 v18.61,32.74 | 13.24,43.35 9.74,43.35 C1.1 | D1.A 13.24,43.35
  Bottom 0.152: v17.88,25.32 17.88,26.57 v18.24,26.92 | v17.04,20.17 17.18,20.18 17.94,21.05 v17.94,21.17 | v18.61,32.74 21.05,35.18 v21.11,35.18
RX0  (via drill 0.25)
  Top 0.152: FTDI1.TXO 6.77,38.23 11.2,33.8 12.03,32.96 12.39,32.61 13.62,32.61 14.28,31.95 14.28,27.43 15.57,26.14 24.26,26.14 25.09,25.3 25.09,20.95 v26.39,19.66 | MCU1.46 34.52,22.82 34.65,22.7 34.65,21.82 v34.14,21.31 | v29.95,19.58 29.97,19.56 31.57,19.56 v31.75,19.74
  Bottom 0.152: v31.75,19.74 33.33,21.31 v34.14,21.31 | v29.95,19.58 29.87,19.58 29.84,19.56 26.49,19.56 v26.39,19.66
SCK
  Top 0.152: AVR_ISP1.SCK 19.23,19.38 20.91,19.38 21.77,18.52 25.96,18.52 26.23,18.79 29.21,21.77 30.02,22.58 | 30.02,22.58 MCU1.37 30.02,22.58
SCL  (via drill 0.25)
  Top 0.152: v22.15,28.35 22.62,27.88 27.11,27.88 MCU1.25 | v21.67,29.67 21.67,32.97 20.19,34.44 20.19,36.23 R18.1
  Bottom 0.152: v21.67,29.67 21.67,28.86 22.13,28.4 22.15,28.4 v22.15,28.35
SDA  (via drill 0.25)
  Top 0.152: MCU1.26 27.11,27.39 22.35,27.39 21.34,28.41 v21.34,28.48 | v21.18,30.18 21.18,32.87 19.49,34.57 R19.1
  Bottom 0.152: v21.34,28.48 21.18,28.63 21.18,30.12 v21.18,30.18
SERVO-INDEX
  Top 0.152: 53.75,1.66 53.37,1.29 | 53.37,1.29 52.9,0.81 43.53,0.81 42.23,2.11 R8.2 R9.2 | MCU1.50 36.43,24.88 36.94,24.88 39.9,21.92 53.21,21.92 53.75,21.39 53.75,1.66 | 53.75,1.66 53.37,1.29
SERVO-MIDDLE
  Top 0.152: 54.05,1.54 53.98,1.47 | 53.98,1.47 53.02,0.51 35.68,0.51 R10.2 R11.2 | 53.98,1.47 54.05,1.54 | MCU1.51 36.43,25.38 36.92,25.38 40,22.3 53.26,22.3 54.05,21.51 54.05,1.54
SERVO-PINKY
  Top 0.152: R15.2 R14.2 17.65,7.72 21.72,11.79 21.72,16.51 22.81,17.6 26.37,17.6 31.52,22.76 31.52,22.99 MCU1.40
SERVO-RING
  Top 0.152: R12.2 R13.2 24.03,2.26 23.24,3.05 21.79,3.05 20.57,4.27 20.57,10.11 21.93,11.47 22.02,11.55 22.02,16.38 22.93,17.3 26.5,17.3 32.02,22.83 MCU1.41
SERVO-THUMB
  Top 0.152: MCU1.49 36.87,24.39 39.65,21.61 52.96,21.61 53.44,21.13 53.44,1.79 52.77,1.12 51.43,1.12 R6.2 R7.2
TX0  (via drill 0.25)
  Top 0.152: MCU1.47 35.04,23.49 35.04,22.97 37.06,20.95 37.06,20.55 36.48,19.98 32.25,19.98 32,20.22 v30.15,20.22 | 14.58,27.56 | 14.58,27.56 15.7,26.44 24.39,26.44 25.4,25.43 25.4,21.38 26.6,20.18 v26.9,20.18 | 14.58,27.56 14.58,32.08 13.64,33.02 12.41,33.02 4.66,40.77 FTDI1.RXI
  Bottom 0.152: v26.9,20.18 26.94,20.14 30.07,20.14 v30.15,20.22
VBAT  (via drill 0.25)
  Top 0.508: C15.1 11.44,26.38 C8.1 11.5,24.87 | C13.1 11.49,23.56 11.54,23.61 | C15.1 11.44,29.94 8.89,32.49 C24.+ | VREG2.1 VREG2.2 38.17,16.78 D3.K arc90 35.25,16.61 35.25,18.87 arc90 C20.1 33.4,18.89 | 33.4,18.89 33.03,18.89 C18.1 | C13.1 11.59,21.29 14.67,21.29 VREG1.4 15.94,21.23 | C15.1 LED3.A | C13.1 11.49,16.57 SW1.S1 | C9.1 11.57,23.71 11.57,23.64 11.54,23.61 | 11.5,24.87 11.5,23.65 11.54,23.61 | 11.5,24.87 6.28,24.87 C23.+ | v25.63,19.02 25.61,19.05 21.97,19.05 21.01,20.02 18.14,20.02 16.92,21.23 15.98,21.23 15.94,21.23 | 33.4,18.89 33.39,18.9 v29.18,18.9 | VREG1.3 15.94,21.23
  Bottom 0.508: v25.63,19.02 26.09,19.02 26.12,19 29.08,19 v29.18,18.9
VCC  (via drill 0.25, 0.35)
  Top 0.254: 24.38,28.89 MCU1.23 | 53.06,36.13 53.06,31.54 52.32,30.8 FSR1.1 | 53.06,36.13 53.06,37.34 | 53.06,37.34 53.06,39.09 | 53.06,39.09 53.06,40.39 | 53.06,40.39 53.06,43.69 53,43.69 FSR4.1 | FSR3.1 53.06,39.09 | MCU1.54 38.27,26.89 v38.35,26.81 38.35,24.99 v38.17,24.81 | MCU1.44 33.52,22.5 v33.5,22.47 | v38.28,28.93 38.28,29.21 38.09,29.39 MCU1.59 35.66,29.39 35.33,29.72 34.77,29.72 34.52,29.97 34.52,30.96 v35.03,31.47 | 16.38,34.29 16.38,34.04 16.94,33.48 20.02,33.48 20.62,32.88 20.62,29.95 21.68,28.89 24.38,28.89 | 16.38,34.29 16.38,36.45 | 16.38,36.45 16.38,38.86 | 16.38,38.86 16.38,38.99 | 16.38,38.99 15.88,39.5 C25.1 | C31.1 17.04,39.52 16.38,38.86 | R18.2 16.89,36.96 16.38,36.45 | C27.1 16.03,36.8 16.38,36.45 | R19.2 16.76,34.67 16.38,34.29 | 16.38,38.99 16.38,41.03 | 16.38,41.03 R20.2 | 16.38,41.03 16.27,41.03 D1.K | 53.06,40.39 52.55,40.89 48.9,40.89 | 46.3,44.3 47.6,43.01 47.6,41.3 | 40.89,34.54 41.4,34.54 | 39.44,34.54 40.66,35.76 | 40.89,34.54 41.6,35.25 41.6,37.02 C29.1 | 39.44,34.54 37.44,32.54 v37.34,32.54 | FSR2.1 53.06,36.13 | 53.06,37.34 50.26,34.54 43.65,34.54 | 40.89,34.54 C28.1 | 39.44,34.54 40.89,34.54 | 41.4,34.54 41.98,35.12 41.98,36.46 42.29,36.77 43.62,36.77 C30.1 | C4.1 45.07,32.91 45.07,33.13 43.65,34.54 | 41.4,34.54 43.65,34.54 | C5.1 43.65,34.54 | v24.56,22.81 23.52,22.81 | 23.52,22.81 23.27,22.55 | 23.52,22.81 22.28,24.05 22.28,24.41 | 23.27,22.55 21.31,22.55 20.94,22.55 | 20.94,22.55 19.67,22.55 | 23.27,22.55 C12.1 | 24.38,28.89 23.9,28.41 v23.88,28.41 | 22.28,24.73 22.28,24.41 | v21.08,25.61 22.28,24.41 | v26.67,22.86 27.05,22.48 27.05,22.46 27.36,22.15 27.94,22.15 | MCU1.34 28.52,23.49 28.52,22.68 27.98,22.15 27.94,22.15
  Top 0.254: 27.94,22.15 28.3,21.79 v28.52,21.79 | VREG1.5 20.94,22.55
  Top 0.508: 22.28,24.73 C14.1 | 46.3,44.3 FSR5.1 | v48.83,40.83 48.9,40.89 | 47.6,41.3 v47.7,41.2 | 40.66,35.76 L2.1 | 19.67,22.55 VREG1.6
  Bottom 0.254: v38.28,28.93 38.28,26.89 v38.35,26.81 | v38.17,24.81 35.33,21.97 33.94,21.97 33.63,22.28 33.63,22.35 v33.5,22.47 | v24.56,22.81 24.64,22.73 26.54,22.73 v26.67,22.86 | v33.5,22.48 29.96,22.48 29.27,21.79 v28.52,21.79 | v35.03,31.47 35.26,31.47 36.32,32.54 v37.34,32.54 | v47.7,41.2 48.07,40.83 v48.83,40.83 | v23.88,28.41 21.33,25.86 21.33,25.85 v21.08,25.61
  Bottom 0.508: v33.5,22.48 v33.5,22.47